# Altium PCB dish_controller.PcbDoc
Units mil, origin at the board's own origin, x right, y up, seen from the top; angles counter-clockwise.
Board outline 6000 x 4000 mil, 2 copper layers (Top Layer, Bottom Layer); 4 components, 10 nets, 118 pads, 0 vias.
Unrouted connection lines stored in the file: 15.
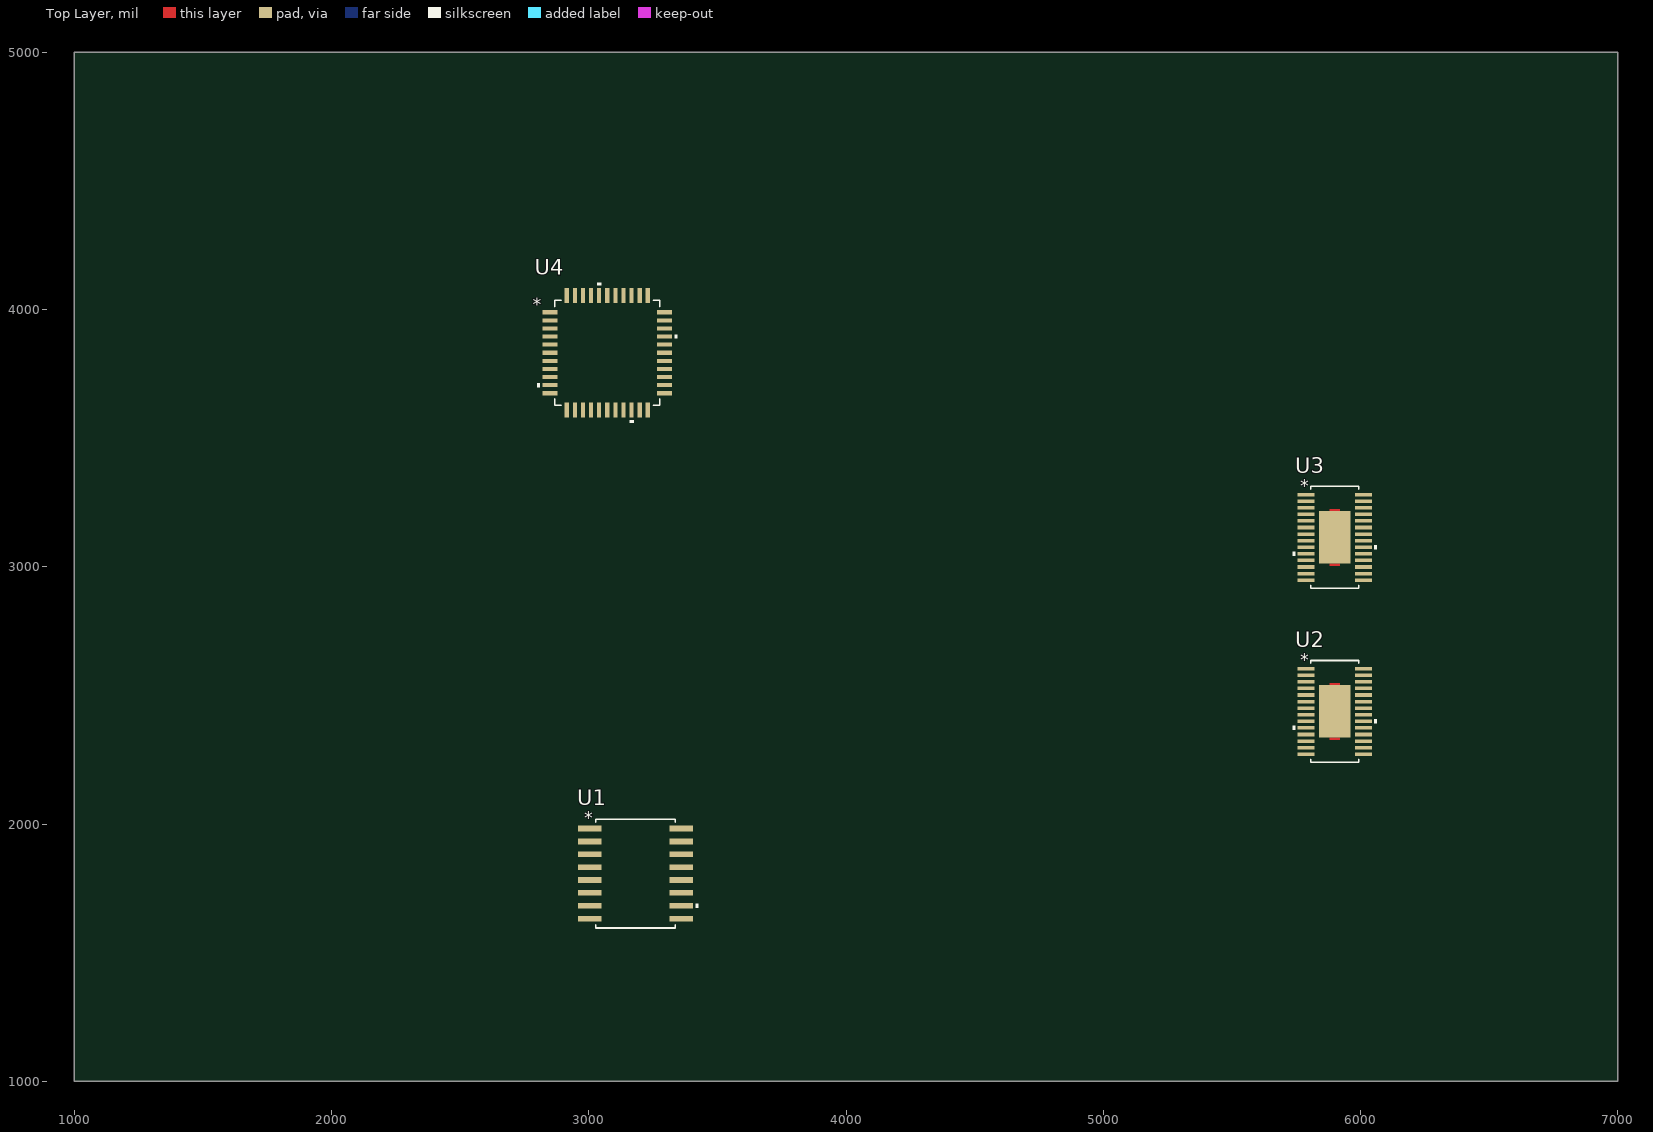
[diagram p0: Top Layer view]
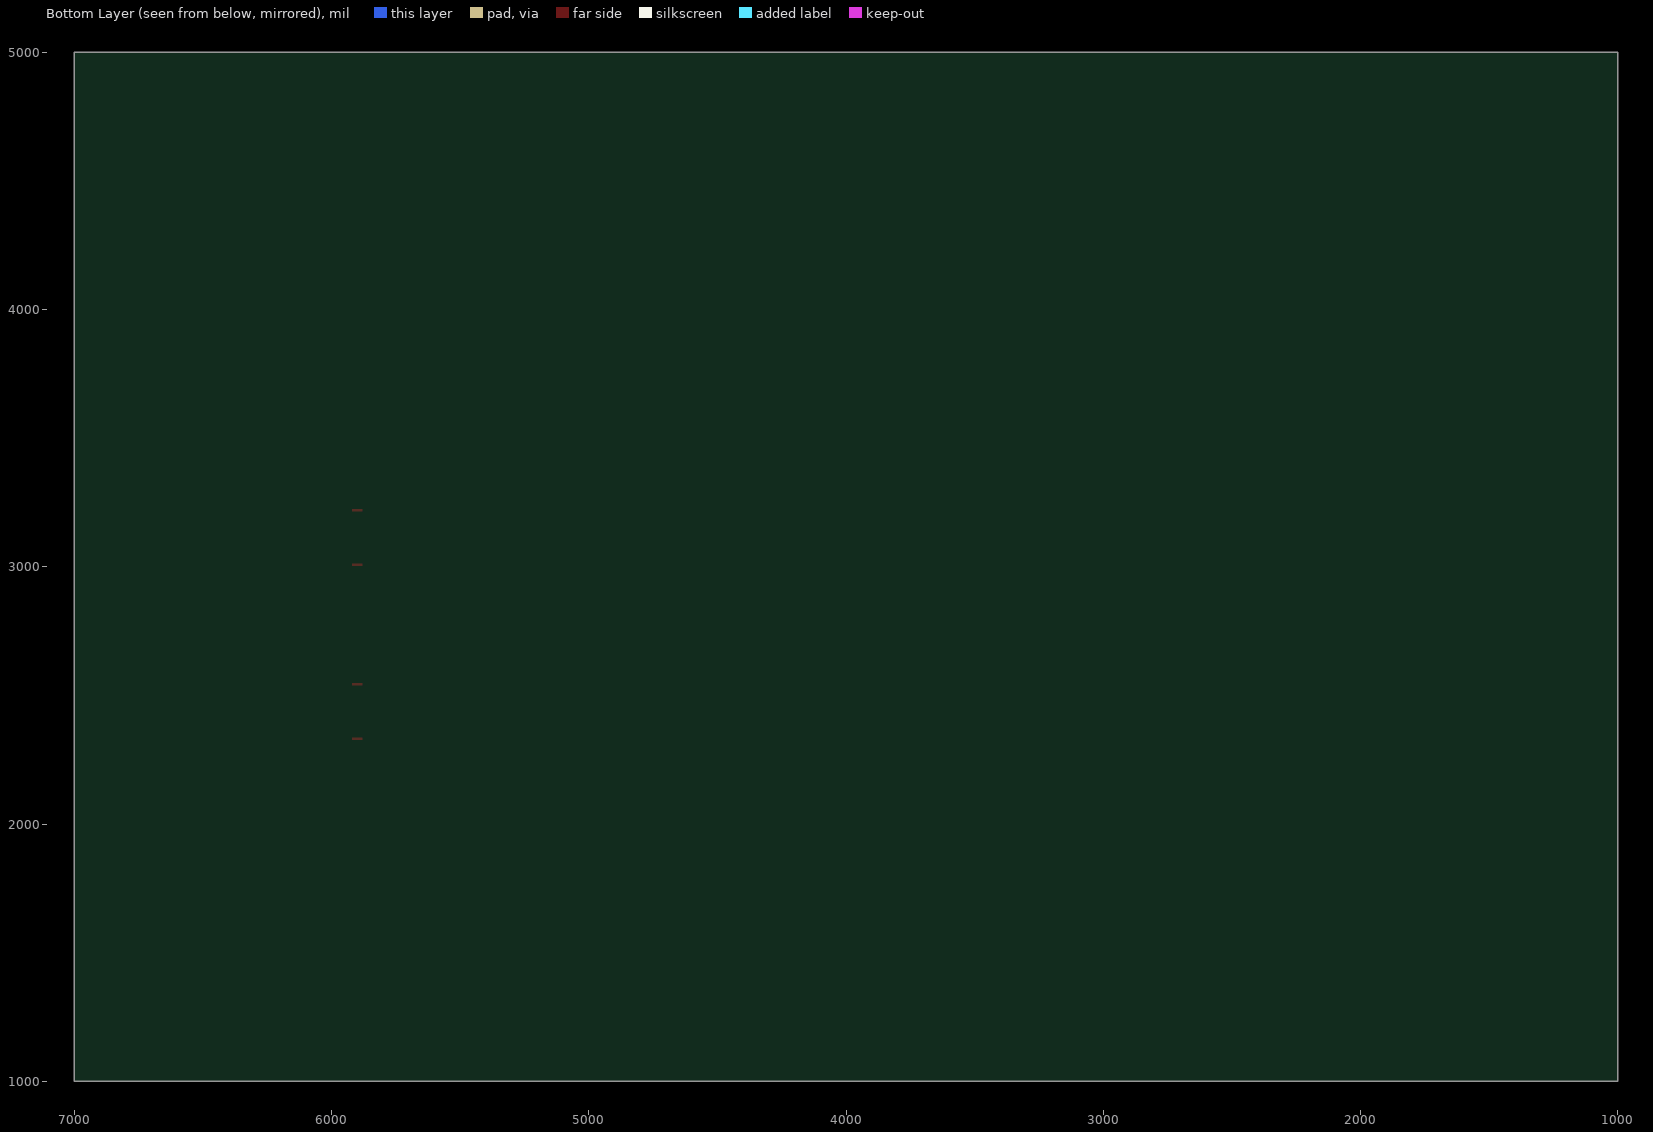
[diagram p1: Bottom Layer view, seen from below]

## Layer stack, top to bottom
Top Solder: solder mask 0.4, Solder Resist, Dk 3.5
Top Layer: signal copper 1.4
Dielectric 1: dielectric 12.6, FR-4, Dk 4.8
Bottom Layer: signal copper 1.4
Bottom Solder: solder mask 0.4, Solder Resist, Dk 3.5

## Board outline
1000,1000 7000,1000 7000,5000 1000,5000

## Design rules (kind name [scope] priority, off if disabled: settings)
Clearance [All] p1: gap=10 ignorepadtopadclearanceinfootprint=FALSE except(0: Arc-Hole Track-Hole SMDPad-Hole THPad-Hole Via-Hole Fill-Hole Poly-Hole Region-Hole Text-Hole)
PolygonConnect [All] p1: connectstyle=Relief reliefconductorwidth=10 reliefentries=4 polygonreliefangle="90 Angle" airgapwidth=10
RoomDefinition micro [InComponentClass('micro')] p1: confinementstyle=ConfineIn formatcopy=TRUE lockcomponents=FALSE outline 1992,2942.01 4737,2942.01 4737,4757.01 1992,4757.01
RoomDefinition h_bridge [InComponentClass('h_bridge')] p2: confinementstyle=ConfineIn formatcopy=TRUE lockcomponents=FALSE outline 4872,1619.05 6748,1619.05 6748,3442.71 4872,3442.71
RoomDefinition comms [InComponentClass('comms')] p3: confinementstyle=ConfineIn formatcopy=TRUE lockcomponents=FALSE outline 1672,1184 4778,1184 4778,2826 1672,2826
RoutingVias [All] p1: holewidth=28 width=50 viastyle="Through Hole" minholewidth=28 minwidth=50 maxholewidth=28 maxwidth=50
SolderMaskExpansion [All] p1: expansion=4
Width [All] p1: maxlimit=10 minlimit=10 preferedwidth=10
30 further rules are at their usual default settings.

## Classes and differential pairs
component class micro: U4
component class h_bridge: U2 U3
component class comms: U1

## Components (designator, comment, footprint, x,y, rotation, side; value= is the part's Value field where it differs from the comment)
U1 "ISO3086TDWR" DW16 3182,1807.2 r0 top value=Value
U2 "DRV8840PWPR" PWP28_5P18X3P1 5900,2437.61 r0 top value=Value
U3 "DRV8840PWPR" PWP28_5P18X3P1 5900,3114.36 r0 top value=Value
U4 "ATMEGA32U4-AUR" 44ML 3072,3832.01 r0 top value=Value

## Footprints (in the part's own frame and the unit in brackets; to place one, negate y for a bottom-side part, rotate by r counter-clockwise, add the part's x,y. Pads: shape width x height; smd on the part's side, far side on the other; paste and mask are expansions set on the pad)
44ML [mil]
  rect 58x16 smd paste+0 mask+0: 1(-223,157.48) 2(-223,125.98) 3(-223,94.49) 4(-223,62.99) 5(-223,31.5) 6(-223,0) 7(-223,-31.5) 8(-223,-62.99) 9(-223,-94.49) 10(-223,-125.98) 11(-223,-157.48) 23(223,-157.48) 24(223,-125.98) 25(223,-94.49) 26(223,-62.99) 27(223,-31.5) 28(223,0) 29(223,31.5) 30(223,62.99) 31(223,94.49) 32(223,125.98) 33(223,157.48)
  rect 16x58 smd paste+0 mask+0: 12(-157.48,-223) 13(-125.98,-223) 14(-94.49,-223) 15(-62.99,-223) 16(-31.5,-223) 17(0,-223) 18(31.5,-223) 19(62.99,-223) 20(94.49,-223) 21(125.98,-223) 22(157.48,-223) 34(157.48,223) 35(125.98,223) 36(94.49,223) 37(62.99,223) 38(31.5,223) 39(0,223) 40(-31.5,223) 41(-62.99,223) 42(-94.49,223) 43(-125.98,223) 44(-157.48,223)
  silkscreen extent -272,-272 272,272, body extent -238,-238 238,238, height 63
DW16 [mil]
  rect 91x22 smd paste+0 mask+0: 1(-178,175) 2(-178,125) 3(-178,75) 4(-178,25) 5(-178,-25) 6(-178,-75) 7(-178,-125) 8(-178,-175) 9(178,-175) 10(178,-125) 11(178,-75) 12(178,-25) 13(178,25) 14(178,75) 15(178,125) 16(178,175)
  silkscreen extent -154,-212 244,212, body extent -209,-206 209,206, height 104
PWP28_5P18X3P1 [mil]
  rect 66x14 smd paste+0 mask+0: 1(-111,166.34) 2(-111,140.75) 3(-111,115.16) 4(-111,89.57) 5(-111,63.98) 6(-111,38.39) 7(-111,12.8) 8(-111,-12.8) 9(-111,-38.39) 10(-111,-63.98) 11(-111,-89.57) 12(-111,-115.16) 13(-111,-140.75) 14(-111,-166.34) 15(111,-166.34) 16(111,-140.75) 17(111,-115.16) 18(111,-89.57) 19(111,-63.98) 20(111,-38.39) 21(111,-12.8) 22(111,12.8) 23(111,38.39) 24(111,63.98) 25(111,89.57) 26(111,115.16) 27(111,140.75) 28(111,166.34)
  rect 122.05x203.94 smd paste+0 mask+0: 29(0,0)
  Top Layer region: 18.7,101.97 -18.7,101.97 -18.7,101.97 -18.7,101.97 -18.7,109.84 18.7,109.84 18.7,101.97 18.7,101.97
  Top Layer region: 18.7,-101.97 -18.7,-101.97 -18.7,-101.97 -18.7,-101.97 -18.7,-109.84 18.7,-109.84 18.7,-101.97 18.7,-101.97
  silkscreen extent -164,-198 164,198, body extent -130,-193 130,193, height 67

## Part data
U1 U2 U3: "Imported", Manufacturer="Texas Instruments", Built_By=EMA_UL_Team, C="Copyright (C) 2015 Accelerated Designs. All rights reserved", RefDes=RefDes, Type=DEV, Vendor="Texas Instruments"
  U1: Manufacturer_Part_Number=ISO3086TDWR
  U2 U3: Manufacturer_Part_Number=DRV8840PWPR
U4: "Imported", Built_By=EMA_UL_Team, C="Copyright (C) 2015 Accelerated Designs. All rights reserved", Manufacturer_Part_Number=ATMEGA32U4-AUR, RefDes=RefDes, Type=DEV, Vendor=Atmel

## Nets (pads, with @x,y where several pads share a name; then routed paths per layer and width w, separated by ;. In a path a pad name is that pad's centre, name@x,y a point inside that pad or via, vN(x,y) a via of type N, cw(c..) or ccw(c..) an arc to the next point about the centre after c; other vN are vias at no path point)
+24V: U2.4 U2.11 U3.4 U3.11
GND: U2.14 U2.28 U2.29 U3.14 U3.28 U3.29
NetU2_5: U2.5 U2.10
NetU2_6: U2.6 U2.9
NetU2_7: U2.7 U2.8
NetU2_12: U2.12 U2.13
NetU3_5: U3.5 U3.10
NetU3_6: U3.6 U3.9
NetU3_7: U3.7 U3.8
NetU3_12: U3.12 U3.13
pads on no net: U1.1 U1.2 U1.3 U1.4 U1.5 U1.6 U1.7 U1.8 U1.9 U1.10 U1.11 U1.12 U1.13 U1.14 U1.15 U1.16 U2.1 U2.2 U2.3 U2.15 U2.16 U2.17 U2.18 U2.19 U2.20 U2.21 U2.22 U2.23 U2.24 U2.25 U2.26 U2.27 U3.1 U3.2 U3.3 U3.15 U3.16 U3.17 U3.18 U3.19 U3.20 U3.21 U3.22 U3.23 U3.24 U3.25 U3.26 U3.27 U4.1 U4.2 U4.3 U4.4 U4.5 U4.6 U4.7 U4.8 U4.9 U4.10 U4.11 U4.12 U4.13 U4.14 U4.15 U4.16 U4.17 U4.18 U4.19 U4.20 U4.21 U4.22 U4.23 U4.24 U4.25 U4.26 U4.27 U4.28 U4.29 U4.30 U4.31 U4.32 U4.33 U4.34 U4.35 U4.36 U4.37 U4.38 U4.39 U4.40 U4.41 U4.42 U4.43 U4.44

## Text inside footprints (layer, text, board x,y; h text height)
U1: Mechanical 13 "*" at 3035,1960.7 h50; Top Overlay "*" at 2981.5,1999.2 h50
U2: Mechanical 13 "*" at 5809,2567.95 h50; Top Overlay "*" at 5766.5,2612.95 h50
U3: Mechanical 13 "*" at 5809,3244.71 h50; Top Overlay "*" at 5766.5,3289.71 h50
U4: Mechanical 13 "*" at 2875.5,3980.24 h50; Top Overlay "*" at 2782.5,3995.24 h50